# Altium PCB edl_final.PcbDoc
Units mil, origin at the board's own origin, x right, y up, seen from the top; angles counter-clockwise.
Board outline 2700 x 2100 mil, 2 copper layers (Top Layer, Bottom Layer); 67 components, 53 nets, 310 pads, 438 vias.
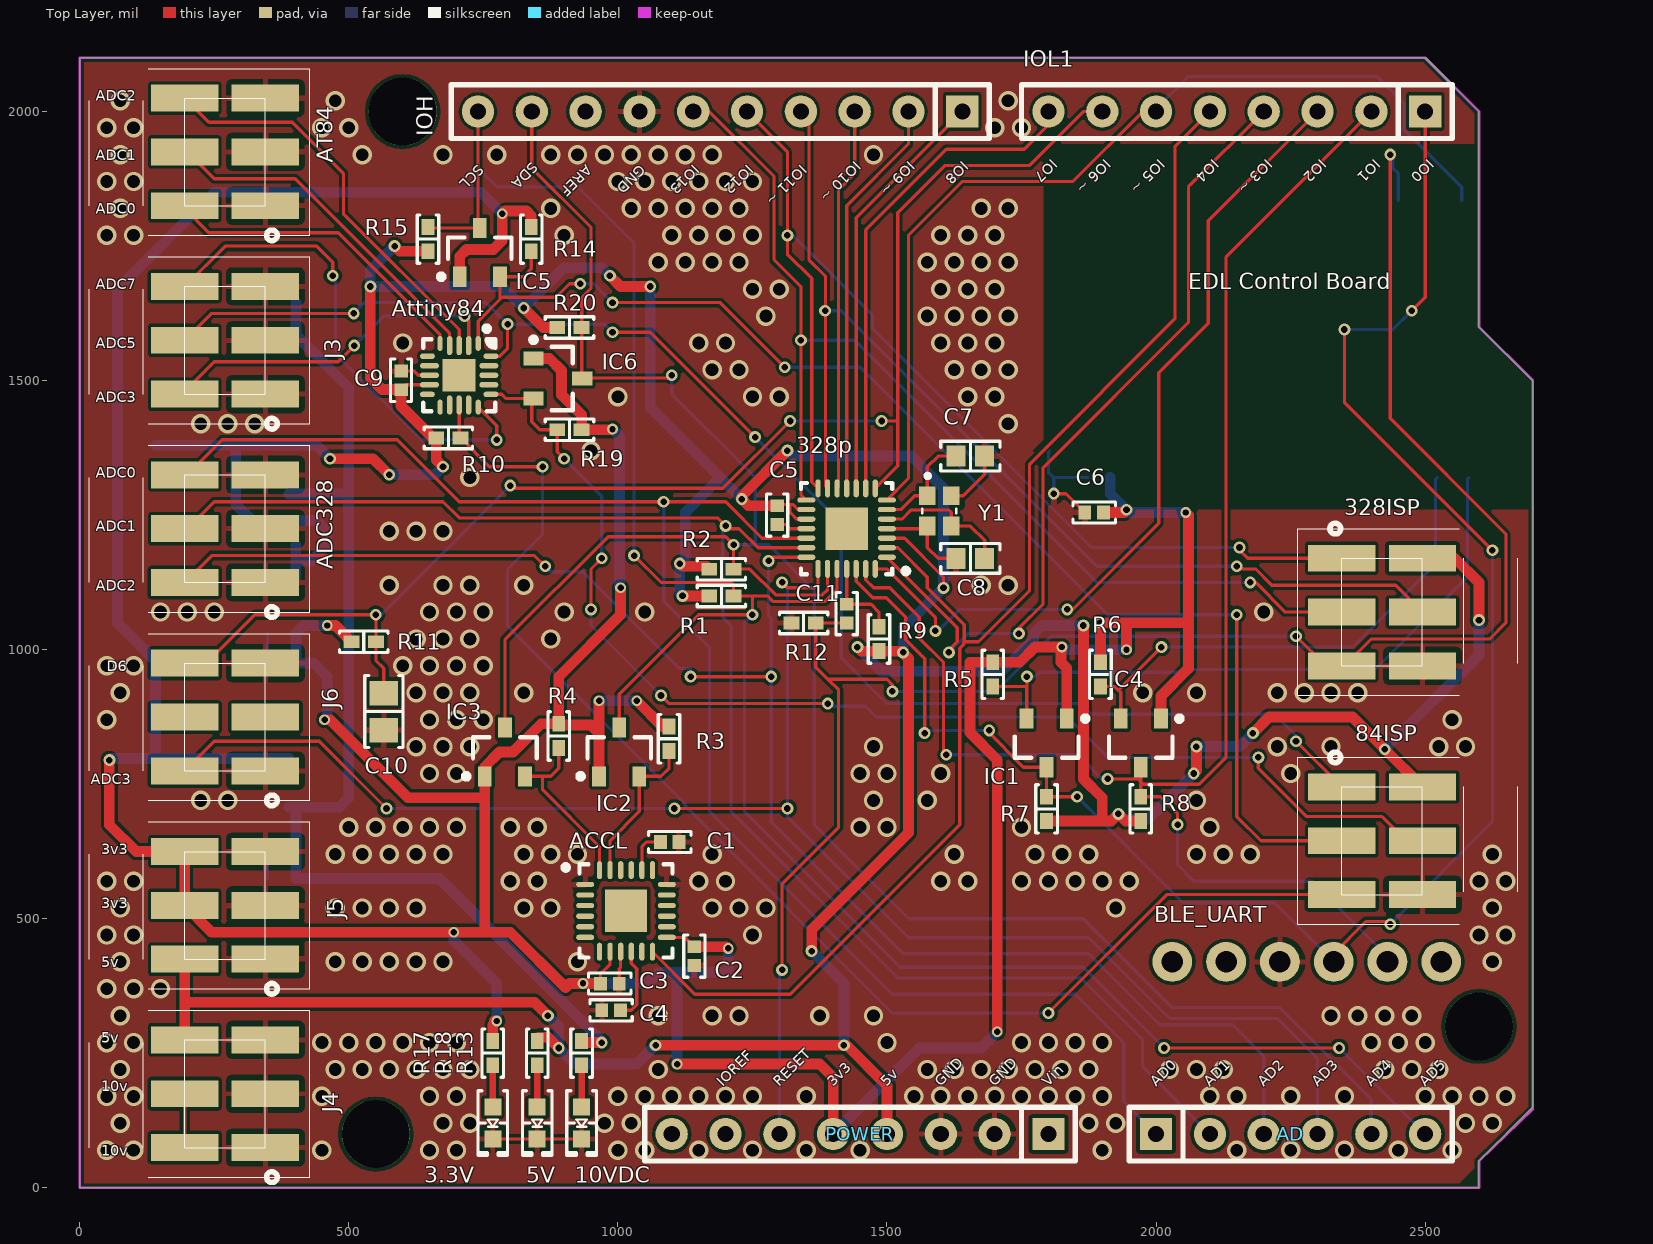
[diagram p0: Top Layer view]
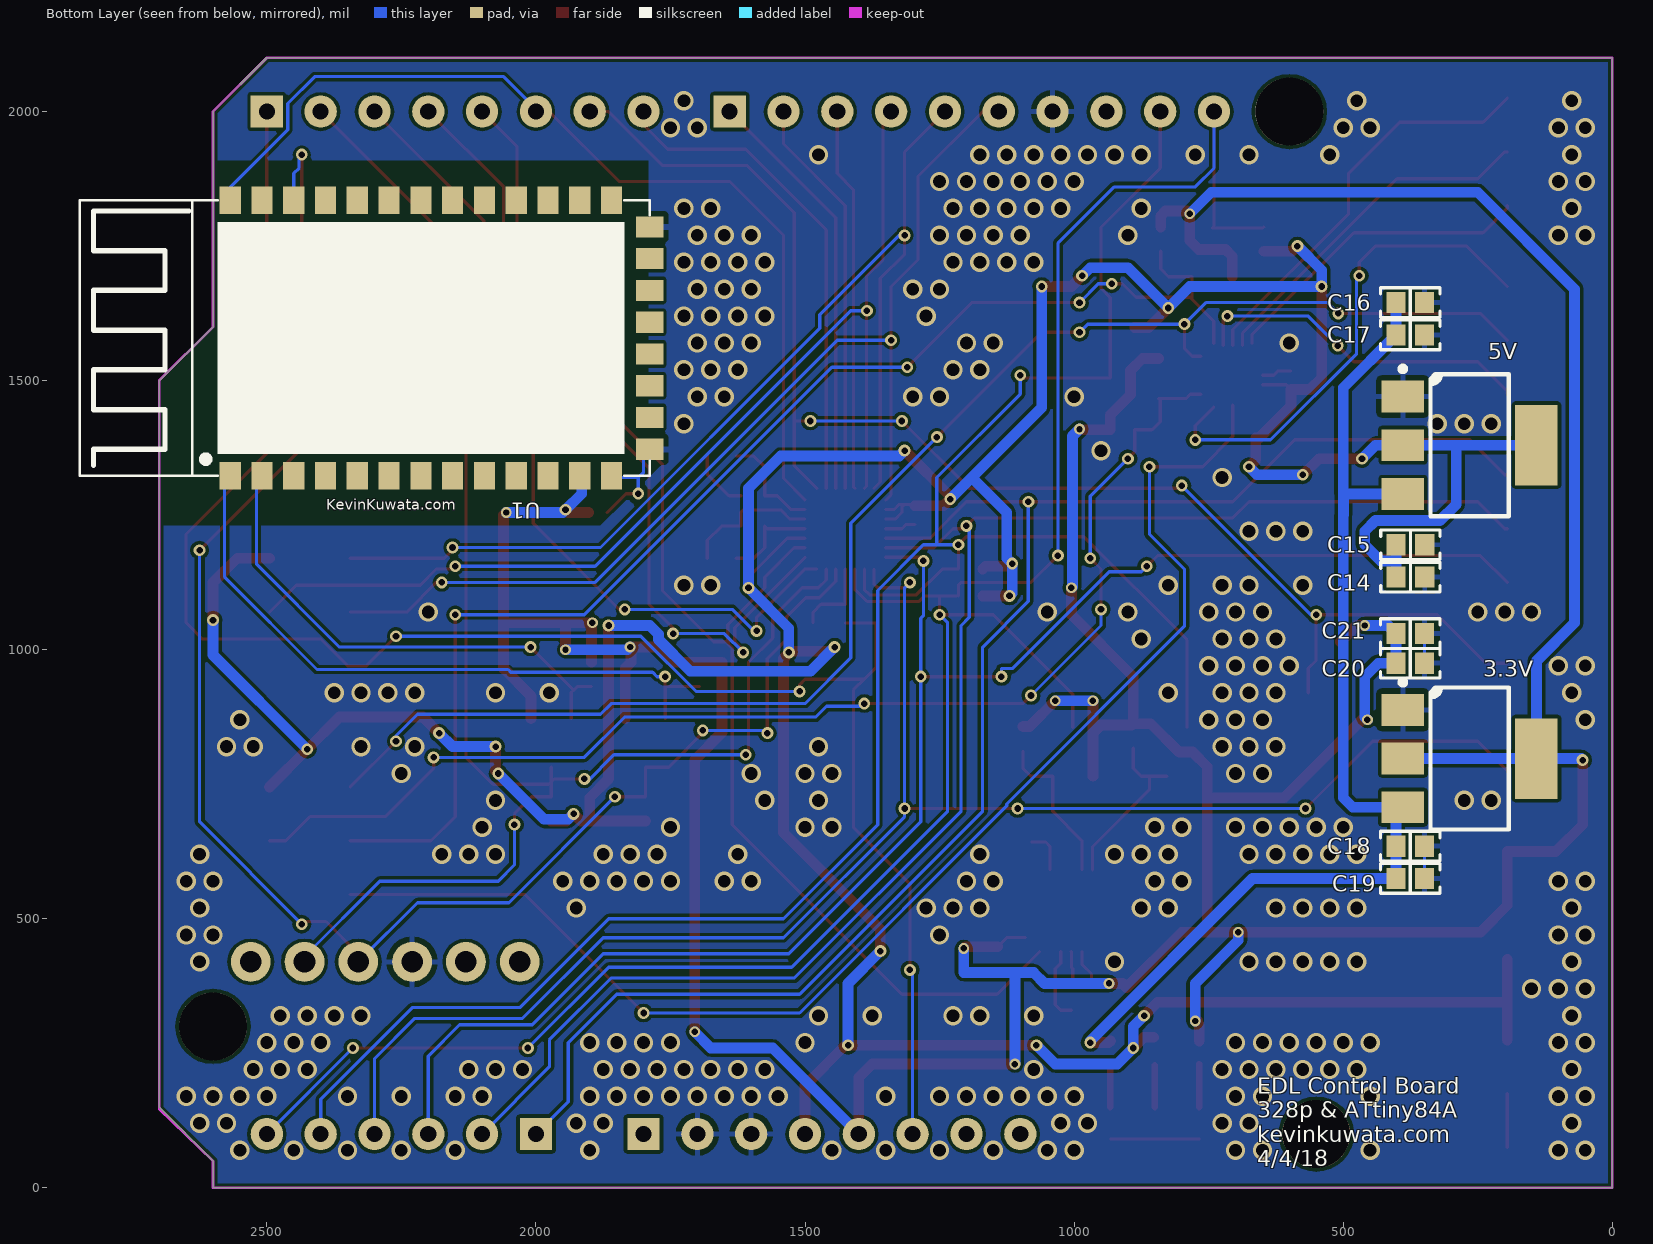
[diagram p1: Bottom Layer view, seen from below]

## Layer stack, top to bottom
Top Solder: solder mask 0.4, Solder Resist, Dk 3.5
Top Layer: signal copper 1.4
Dielectric1: dielectric 12.6, FR-4, Dk 4.8
Bottom Layer: signal copper 1.4
Bottom Solder: solder mask 0.4, Solder Resist, Dk 3.5

## Board outline
0,0 0,2100 2500,2100 2600,2000 2600,1600 2700,1500 2700,150 2600,50 2600,0

## Design rules (kind name [scope] priority, off if disabled: settings)
Clearance [All] p1: gap=6 ignorepadtopadclearanceinfootprint=FALSE
HoleSize [All] p1: absolutevalues=TRUE maxlimit=100 minlimit=11.81 maxpercent=80.000 minpercent=20.000
PolygonConnect [All] p1: connectstyle=Relief reliefconductorwidth=10 reliefentries=4 polygonreliefangle="90 Angle" airgapwidth=10
RoutingTopology [OnLayer('Top Layer')] p1: topology=Vertical
RoutingTopology RoutingTopology_1 [OnLayer('Bottom Layer')] p2: topology=Vertical
RoutingVias [All] p1: holewidth=11.81 width=20 viastyle="Through Hole" minholewidth=11.81 minwidth=20 maxholewidth=12.2 maxwidth=22
SilkToSolderMaskClearance SilkscreenOverComponentPads [IsPad] p1: minsilkscreentomaskgap=10 clearancetoexposedcopper=TRUE
SolderMaskExpansion [All] p1: expansion=4
Width [InNet('3V3')] p1: maxlimit=100 minlimit=6 preferedwidth=20
Width Width_2 [InNet('5V')] p2: maxlimit=50 minlimit=6 preferedwidth=20
Width Width_1 [All] p3: maxlimit=50 minlimit=6 preferedwidth=6
27 further rules are at their usual default settings.

## Components (designator, comment, footprint, x,y, rotation, side; value= is the part's Value field where it differs from the comment)
3.3V "Colour" "LED 0603/1608 RED" 767.5,120.47 r270 top value=Green
3.3V "NCP1117ST15T3G" "ON SEMI SOT-223 ST(318H)" 265,797.72 r180 bottom
5V "Colour" "LED 0603/1608 RED" 850,120.47 r270 top value=Green
5V "5v" "ON SEMI SOT-223 ST(318H)" 265,1380 r180 bottom
10VDC "Colour" "LED 0603/1608 RED" 932.5,120.47 r270 top value=Green
84ISP "smd2x6_90*" smd36 2433.01,770 r270 top
328ISP "smd2x6_90*" smd36 2433.01,1195 r270 top
328p "atmeag328p" yy] 1425,1225 r180 top
ACCL "MPU6050" MPU-6050 1015,514.72 r0 top
AD "AD" "Header 6x1 8.5mm" 2000,100 r0 top locked
ADC328 "smd2x6_90*" smd36 256.99,1100 r90 top (schematic designator ADC012)
AT84 "smd2x6_90*" smd36 256.99,1800 r90 top (schematic designator J2)
Attiny84 "ATTINY84A-MMH" "Atmel VQFN-20 3x3mm 20M2" 705,1510 r270 top
BLE_UART "HC-05 Header" 1X06_NO_SILK 2530,420 r180 top
C1 "2.2nF" "CAP 0402/1005" 1096.32,642.72 r0 top value=0.1uF
C2 "0.1uF" "CAP 0402/1005" 1142,430.72 r90 top
C3 "0.01uF" "CAP 0402/1005" 985,379.72 r180 top value=0.1uF
C4 "0.1uF" "CAP 0402/1005" 987.32,330 r0 top
C5 "0.1uF" "CAP 0402/1005" 1296,1250.13 r270 top
C6 "0.1uF" "CAP 0402/1005" 1885,1255 r0 top
C7 "22pF" "CAP 0603/1608" 1655,1359.8 r180 top
C8 "22pF" "CAP 0603/1608" 1655,1169.8 r0 top
C9 "0.1uF" "CAP 0402/1005" 597,1500.68 r270 top
C10 "10uF" "RES 0805/2012" 565,885 r270 top value=0.1uF
C11 "0.1uF" "CAP 0402/1005" 1425,1067.13 r270 top
C14 "47uF" "CAP 0603/1608" 375,1135 r0 bottom value=0.1uF
C15 "47uF" "CAP 0603/1608" 375,1195 r0 bottom value=0.1uF
C16 "47uF" "CAP 0603/1608" 375.24,1645 r0 bottom value=0.1uF
C17 "47uF" "CAP 0603/1608" 375.24,1585 r0 bottom value=0.1uF
C18 "47uF" "CAP 0603/1608" 375.24,635 r0 bottom value=0.1uF
C19 "47uF" "CAP 0603/1608" 375.24,575 r0 bottom value=0.1uF
C20 "47uF" "CAP 0603/1608" 375.24,975 r0 bottom value=0.1uF
C21 "47uF" "CAP 0603/1608" 375.24,1030 r0 bottom value=0.1uF
IC1 "2N7002-7-F" "DIODES SOT-23-3" 1796.57,826.81 r270 top
IC2 "2N7002-7-F" "DIODES SOT-23-3" 1002.4,810 r90 top
IC3 "2N7002-7-F" "DIODES SOT-23-3" 790,810 r90 top
IC4 "2N7002-7-F" "DIODES SOT-23-3" 1971.57,826.81 r270 top
IC5 "2N7002-7-F" "DIODES SOT-23-3" 743.4,1738.39 r90 top
IC6 "2N7002-7-F" "DIODES SOT-23-3" 888.39,1504 r0 top
IOH "IOH" "Header 10x1 8.5mm" 1640,2000 r180 top locked
IOL1 "IOL" "Header 8x1 8.5mm" 2500,2000 r180 top locked
J3 "smd2x6_90*" smd36 256.99,1450 r90 top
J4 "smd2x6_90*" smd36 256.99,50 r90 top
J5 "smd2x6_90*" smd36 256.99,400 r90 top
J6 "smd2x6_90*" smd36 256.99,750 r90 top
POWER "POWER_UNO" "Header 8x1 8.5mm" 1800,100 r180 top locked
R1 "10k" "RES 0402/1005" 1192.36,1099.8 r180 top
R2 "10k" "RES 0402/1005" 1192.36,1149.8 r180 top
R3 "10k" "RES 0402/1005" 1095,834.61 r90 top
R4 "10k" "RES 0402/1005" 890,839.72 r90 top
R5 "10k" "RES 0402/1005" 1696.57,954.17 r90 top
R6 "10k" "RES 0402/1005" 1896.57,954.17 r90 top
R7 "10k" "RES 0402/1005" 1796.57,704.17 r270 top
R8 "10k" "RES 0402/1005" 1971.57,704.17 r270 top
R9 "10k" "RES 0402/1005" 1485,1020 r270 top
R10 "10k" "RES 0402/1005" 685,1393.62 r180 top
R11 "10k" "RES 0402/1005" 527.64,1015 r180 top
R12 "1K" "RES 0402/1005" 1345,1049.8 r0 top
R13 "10k" "RES 0402/1005" 932.5,250.47 r90 top
R14 "10k" "RES 0402/1005" 839,1763 r90 top
R15 "10k" "RES 0402/1005" 647,1763 r270 top
R17 "" "RES 0402/1005" 767.5,250.47 r90 top value=1k
R18 "1k" "RES 0402/1005" 850,250.47 r90 top
R19 "10k" "RES 0402/1005" 910,1408.62 r0 top
R20 "10k" "RES 0402/1005" 910,1598.62 r180 top
U1 "MOUDLE-BLUETOOTH-HC-05(34P-27X13MM)" BT34P-SMD-1.5-26.9X13.0X2.2MM 1788.58,1579.09 r90 bottom
Y1 "FA238" OSCCC200X160X50 1597.24,1257.95 r270 top (schematic designator 1)

## Footprints (in the part's own frame and the unit in brackets; to place one, negate y for a bottom-side part, rotate by r counter-clockwise, add the part's x,y. Pads: shape width x height; smd on the part's side, far side on the other; paste and mask are expansions set on the pad)
1X06_NO_SILK [mil]
  round 74 hole 40: 1(0,0) 2(100,0) 3(200,0) 4(300,0) 5(400,0) 6(500,0)
"Atmel VQFN-20 3x3mm 20M2" [mm] "VQFN, 20-Leads, Body 3.00x3.00mm, Pitch 0.45mm, Thermal Pad 1.55x1.55mm, IPC Medium Density"
  oval 0.7x0.25 smd: 1(-1.5,0.9) 5(-1.5,-0.9) 11(1.5,-0.9) 15(1.5,0.9)
  oval 0.9x0.25 smd: 2(-1.4,0.45) 3(-1.4,0) 4(-1.4,-0.45) 12(1.4,-0.45) 13(1.4,0) 14(1.4,0.45)
  oval 0.25x0.7 smd: 6(-0.9,-1.5) 10(0.9,-1.5) 16(0.9,1.5) 20(-0.9,1.5)
  oval 0.25x0.9 smd: 7(-0.45,-1.4) 8(0,-1.4) 9(0.45,-1.4) 17(0.45,1.4) 18(0,1.4) 19(-0.45,1.4)
  rect 1.55x1.55 smd: 21(0,0)
  silkscreen extent -2.32,-1.7 1.7,1.7, body extent -1.55,-1.55 1.55,1.55, height 0.85
BT34P-SMD-1.5-26.9X13.0X2.2MM [mm]
  rect 1.3x1 smd: 1(-6.5,19.8) 2(-6.5,18.3) 3(-6.5,16.8) 4(-6.5,15.3) 5(-6.5,13.8) 6(-6.5,12.3) 7(-6.5,10.8) 8(-6.5,9.3) 9(-6.5,7.8) 10(-6.5,6.3) 11(-6.5,4.8) 12(-6.5,3.3) 13(-6.5,1.8) 22(6.5,1.8) 23(6.5,3.3) 24(6.5,4.8) 25(6.5,6.3) 26(6.5,7.8) 27(6.5,9.3) 28(6.5,10.8) 29(6.5,12.3) 30(6.5,13.8) 31(6.5,15.3) 32(6.5,16.8) 33(6.5,18.3) 34(6.5,19.8)
  rect 1x1.3 smd: 14(-5.25,0) 15(-3.75,0) 16(-2.25,0) 17(-0.75,0) 18(0.75,0) 19(2.25,0) 20(3.75,0) 21(5.25,0)
  silkscreen extent -6.5,0 6.5,26.9, body extent -6.6,-0.23 6.4,26.67, height 3.8
"CAP 0402/1005" [mm] "Chip Capacitor, 2-Leads, Body 1.02x0.51mm, IPC Medium Density"
  rect 0.6x0.64 smd: 1(-0.44,0) 2(0.44,0)
  silkscreen extent -1,-0.5 1,0.5, body extent -0.5,-0.26 0.5,0.26, height 0.52
"CAP 0603/1608" [mm] "Chip Capacitor, 2-Leads, Body 1.60x0.80mm, IPC Medium Density"
  rect 0.9x1 smd: 1(-0.675,0) 2(0.675,0)
  silkscreen extent -1.4,-0.7 1.4,0.7, body extent -0.8,-0.41 0.8,0.41, height 0.82
"DIODES SOT-23-3" [mm] "SOT23, 3-Leads, Body 2.90x2.40mm, Pitch 0.95mm, IPC Medium Density"
  rect 0.95x0.65 smd: 1(-1.15,0.95) 2(1.15,0) 3(-1.15,-0.95)
  silkscreen extent -1.27,-1.5 0.7,1.95, body extent -1.41,-1.45 1.41,1.45, height 1.5
"Header 6x1 8.5mm" [mil] "Stackable 6 pin header"
  rect 60x60 hole 30: 1(0,0)
  round 60 hole 30: 2(100,0) 3(200,0) 4(300,0) 5(400,0) 6(500,0)
  silkscreen extent -50,-50 550,50, body extent -50,-50 550,50, height 335
"Header 8x1 8.5mm" [mil] "Stackable 8 pin header"
  rect 60x60 hole 30: 1(0,0)
  round 60 hole 30: 2(100,0) 3(200,0) 4(300,0) 5(400,0) 6(500,0) 7(600,0) 8(700,0)
  silkscreen extent -50,-50 750,50, body extent -50,-50 750,50, height 335
"Header 10x1 8.5mm" [mil] "Stackable 10 pin header"
  rect 60x60 hole 30: 1(0,0)
  round 60 hole 30: 2(100,0) 3(200,0) 4(300,0) 5(400,0) 6(500,0) 7(600,0) 8(700,0) 9(800,0) 10(900,0)
  silkscreen extent -50,-50 950,50, body extent -50,-50 950,50, height 335
"LED 0603/1608 RED" [mm] "Chip Diode, 2-Leads, Body 1.60x0.80mm, IPC Medium Density"
  rect 0.8x0.8 smd: 1(-0.75,0) 2(0.75,0)
  silkscreen extent -1.52,-0.7 1.52,0.7, body extent -0.8,-0.4 0.8,0.4, height 0.53
MPU-6050 [mm] "QFN, 24-Leads, Body 4.00x4.00mm, Pitch 0.50mm, Thermal Pad 2.00x2.00mm, IPC Medium Density"
  oval 0.85x0.25 smd: 1(-1.925,1.25) 2(-1.925,0.75) 3(-1.925,0.25) 4(-1.925,-0.25) 5(-1.925,-0.75) 6(-1.925,-1.25) 13(1.925,-1.25) 14(1.925,-0.75) 15(1.925,-0.25) 16(1.925,0.25) 17(1.925,0.75) 18(1.925,1.25)
  oval 0.25x0.85 smd: 7(-1.25,-1.925) 8(-0.75,-1.925) 9(-0.25,-1.925) 10(0.25,-1.925) 11(0.75,-1.925) 12(1.25,-1.925) 19(1.25,1.925) 20(0.75,1.925) 21(0.25,1.925) 22(-0.25,1.925) 23(-0.75,1.925) 24(-1.25,1.925)
  rect 2x2 smd: 25(0,0)
  silkscreen extent -2.97,-2.2 2.2,2.2, body extent -2.1,-2.1 2.1,2.1, height 0.95
"ON SEMI SOT-223 ST(318H)" [mm] "SOT223, 4-Leads, Body 6.50x7.00mm (avg), Pitch 2.30mm, IPC Medium Density"
  rect 2x1.5 smd: 1(-3.15,2.3) 2(-3.15,0) 3(-3.15,-2.3)
  rect 2x3.8 smd: 4(3.15,0)
  silkscreen extent -3.27,-3.35 1.85,3.72, body extent -3.52,-3.25 3.5,3.25, height 1.8
OSCCC200X160X50 [mm]
  rect 0.89x0.79 smd: 1(-0.715,-0.565) 2(0.715,-0.565) 3(0.715,0.565) 4(-0.715,0.565)
  silkscreen extent -1.75,-0.8 0.1,0.8
"RES 0402/1005" [mm] "Chip Resistor, 2-Leads, Body 1.0x0.5mm, IPC Medium Density"
  rect 0.75x0.6 smd: 1(-0.575,0) 2(0.575,0)
  silkscreen extent -1.14,-0.51 1.14,0.51, body extent -0.5,-0.25 0.5,0.25, height 0.35
"RES 0805/2012" [mm] "Chip Resistor, 2-Leads, Body 2.00x1.25mm, IPC Medium Density"
  rect 1.15x1.35 smd: 1(-0.875,0) 2(0.875,0)
  silkscreen extent -1.7,-0.9 1.7,0.9, body extent -0.95,-0.62 1.05,0.63, height 0.6
smd36 [mm] "double header DH http://suddendocs.samtec.com/prints/tsm-dh-footprint.pdf"
  rect 1.27x3.18 smd: 1(0.635,-2.235) 2(3.175,-2.235) 3(5.715,-2.235) 4(5.715,1.575) 5(3.175,1.575) 6(0.635,1.575)
  silkscreen extent -1.02,-4.32 7.11,6.07
yy] [mm] "QFN, 28-Leads, Body 3.98x3.98mm, Pitch 0.45mm, Thermal Pad 2.00x2.00mm, IPC Medium Density"
  oval 0.85x0.25 smd: 1(-1.9,1.35) 2(-1.9,0.9) 3(-1.9,0.45) 4(-1.9,0) 5(-1.9,-0.45) 6(-1.9,-0.9) 7(-1.9,-1.35) 15(1.9,-1.35) 16(1.9,-0.9) 17(1.9,-0.45) 18(1.9,0) 19(1.9,0.45) 20(1.9,0.9) 21(1.9,1.35)
  oval 0.25x0.85 smd: 8(-1.35,-1.9) 9(-0.9,-1.9) 10(-0.45,-1.9) 11(0,-1.9) 12(0.45,-1.9) 13(0.9,-1.9) 14(1.35,-1.9) 22(1.35,1.9) 23(0.9,1.9) 24(0.45,1.9) 25(0,1.9) 26(-0.45,1.9) 27(-0.9,1.9) 28(-1.35,1.9)
  rect 2x2 smd: 29(0,0)
  silkscreen extent -2.93,-2.15 2.15,2.15, body extent -2.05,-2.05 2.05,2.05, height 0.95

## Part data
3.3V 5V 10VDC: library part LTST-C191KRKT, "LED RED CLEAR 0603 SMD", Part Number=LTST-C191KRKT
3.3V: "IC REG LDO 1.5V 1A SOT223", Part Number=NCP1117ST15T3G
5V: library part NCP1117ST15T3G, "IC REG LDO 1.5V 1A SOT223", Part Number=NCP1117ST15T3G
84ISP 328ISP ADC328 AT84 J3 J4 J5 J6: library part SAM10788-ND, "90 degree 0.1\" header digkey SAM10788-ND", Digikey=SAM10788-ND
328p: library part 328p_28QFN, "28 pin qfn, or mlf 28 pin compatible with uno", Package="28QFN 4x4", Digikey=ATMEGA328P-MURCT-ND
ACCL: library part MPU-6050, "IMU ACCEL/GYRO 3-AXIS I2C 24QFN", Name=MPU6050
AD: Supplier Part Number 1=2699089, Supplier 1=Arrow, Supplier 2=Digi-Key, Supplier 3=Arrow, Supplier 4=Arrow, Supplier Part Number 2=SAM1198-06-ND, Supplier Part Number 3=2699088, Supplier Part Number 4=2699075
Attiny84: "IC MCU 8BIT 8KB FLASH 20VQFN", Device Package="20-VFQFN Exposed Pad", Manufacturer=Atmel, Supplier Part Number 1=ATTINY84A-MMH-ND, ComponentLink1Description=Datasheet, ComponentLink1URL=http://www.atmel.com/Images/8183s.pdf, ComponentLink2Description="Digi-Key Listing", ComponentLink2URL=https://www.digikey.com/product-detail/en/ATTINY84A-MMH/ATTINY84A-MMH-ND/3046449, Core Processor=AVR, Core Size=8-Bit, Data Converters="A/D 8x10b", EEPROM Size="512 x 8", Number Of IO=12, Oscillator Type=Internal, PartId=9189, Part Number=ATTINY84A-MMH, Price=1.87, Program Memory Size="8KB (4K x 16)", Program Memory Type=FLASH, Ram Size="512 x 8", Series="AVR® ATtiny", Speed=20MHz, Supplier 1=Digi-Key
BLE_UART: library part CONN_06NO_SILK_NO_POP
C1: library part C1005X7R1C104K050BC, "CAP CER 0.1UF 16V X7R 0402", Device Package="0402 (1005 Metric)", Manufacturer="TDK Corporation", Supplier Part Number 1=445-4952-2-ND, TemperatureCoefficient=X7R, TemperatureRange="-55C ~ 125C", Tolerance=10%, Voltage=50V, ComponentLink1Description=Datasheet, ComponentLink1URL=https://product.tdk.com/info/en/catalog/datasheets/mlcc_commercial_general_en.pdf, ComponentLink2Description="Digi-Key listing", ComponentLink2URL=http://digikey.com/product-detail/en/C1005X7R1C104K050BC/445-4952-2-ND/2093220, PartId=3856, Part Number=C1005X7R1C104K050BC, Price=0.0066, Supplier 1=Digi-Key, Type=-
C2 C3: library part C1005X7R1C104K050BC, "CAP CER 0.1UF 16V X7R 0402", Device Package="0402 (1005 Metric)", Manufacturer="TDK Corporation", Supplier Part Number 1=445-4952-2-ND, TemperatureCoefficient=X7R, TemperatureRange="-55C ~ 125C", Tolerance=10%, Voltage=4V, ComponentLink1Description=Datasheet, ComponentLink1URL=https://product.tdk.com/info/en/catalog/datasheets/mlcc_commercial_general_en.pdf, ComponentLink2Description="Digi-Key listing", ComponentLink2URL=http://digikey.com/product-detail/en/C1005X7R1C104K050BC/445-4952-2-ND/2093220, PartId=3856, Part Number=C1005X7R1C104K050BC, Price=0.0066, Supplier 1=Digi-Key, Type=-
C4: library part C1005X7R1C104K050BC, "CAP CER 0.1UF 16V X7R 0402", Device Package="0402 (1005 Metric)", Manufacturer="TDK Corporation", Supplier Part Number 1=445-4952-2-ND, TemperatureCoefficient=X7R, TemperatureRange="-55C ~ 125C", Tolerance=10%, Voltage=2V, ComponentLink1Description=Datasheet, ComponentLink1URL=https://product.tdk.com/info/en/catalog/datasheets/mlcc_commercial_general_en.pdf, ComponentLink2Description="Digi-Key listing", ComponentLink2URL=http://digikey.com/product-detail/en/C1005X7R1C104K050BC/445-4952-2-ND/2093220, PartId=3856, Part Number=C1005X7R1C104K050BC, Price=0.0066, Supplier 1=Digi-Key, Type=-
C5 C6 C9 C11: library part C1005X7R1C104K050BC, "CAP CER 0.1UF 16V X7R 0402", Device Package=0402, Manufacturer="TDK Corporation", Supplier Part Number 1=445-4952-2-ND, TemperatureCoefficient=X7R, TemperatureRange="-55C ~ 125C", Tolerance=10%, Voltage=10v, ComponentLink1Description=Datasheet, ComponentLink1URL=https://product.tdk.com/info/en/catalog/datasheets/mlcc_commercial_general_en.pdf, ComponentLink2Description="Digi-Key listing", ComponentLink2URL=http://digikey.com/product-detail/en/C1005X7R1C104K050BC/445-4952-2-ND/2093220, PartId=3856, Part Number=C1005X7R1C104K050BC, Price=0.0066, Supplier 1=Digi-Key, Type=-
C7 C8: library part C1608C0G1H220J080AA, "CAP CER 22PF 50V C0G 0603", Device Package=0603, Manufacturer="TDK Corporation", Supplier Part Number 1=445-1273-1-ND, TemperatureCoefficient="C0G, NP0", TemperatureRange="-55C ~ 125C", Tolerance=5%, Voltage=50V, ComponentLink1Description=Datasheet, ComponentLink1URL=https://product.tdk.com/info/en/catalog/datasheets/mlcc_commercial_general_en.pdf, ComponentLink2Description="Digi-Key listing", ComponentLink2URL=http://digikey.com/product-detail/en/C1608C0G1H220J080AA/445-1273-1-ND/567670, PartId=4031, Part Number=C1608C0G1H220J080AA, Price=0.14, Supplier 1=Digi-Key, Type=-
C10: library part C2012X7R1H104K085AA, "CAP CER 0.1UF 50V X7R 0805", Package=0805, Part Number=C2012X7R1H104K085AA
C14 C15 C16 C17 C18 C19 C20 C21: library part C1608X7R1E104K080AA, "CAP CER 0.1UF 25V X7R 0603", Part Number=C1608X7R1E104K080AA
IC1 IC2 IC3 IC4 IC5 IC6: "MOSFET N-CH 60V 115MA SOT23-3", Current Continuous Drain="115mA (Ta)", Device Package="TO-236-3, SC-59, SOT-23-3", Drain to Source Voltage (Vdss)=60V, Input Capacitance (Ciss) at Vds="50pF @ 25V", Manufacturer="Diodes Incorporated", Power - Max=370mW, Supplier Part Number 1=2N7002-FDITR-ND, ComponentLink1Description=Datasheet, ComponentLink1URL=http://www.diodes.com/_files/datasheets/ds11303.pdf, ComponentLink2Description="Digi-Key Listing", ComponentLink2URL=http://www.digikey.com/product-detail/en/2N7002-7-F/2N7002-FDITR-ND/717681, Digikey=1727-1289-1-ND, Features=Standard, Gate Charge (Qg)=-, PartId=7967, Part Number=2N7002-7-F, Price=0.0255, Rds On (Max) at Id, Vgs="7.5 Ohm @ 50mA, 5V", Supplier 1=Digi-Key, Type="MOSFET N-Channel, Metal Oxide", Vgs(th) (Max) at Id="2.5V @ 250uA"
IOH: Supplier Part Number 1=2698803S4475693N1004, Supplier 1=Arrow, Supplier 2=Digi-Key, Supplier 3=Arrow, Supplier Part Number 2=SAM1198-10-ND, Supplier Part Number 3=2698789
IOL1 POWER: Supplier Part Number 1=SAM1198-08-ND, Supplier 1=Digi-Key, Supplier 2=Arrow, Supplier 3=Arrow, Supplier 4=Arrow, Supplier Part Number 2=2698939, Supplier Part Number 3=2698940, Supplier Part Number 4=2698925
R1 R2 R3 R4 R5 R6 R7 R8 R9 R10 R11 R12 R13 R14 R15 R17 R18 R19 R20: library part ERJ-2RKF1002X, "RES SMD 10K OHM 1% 1/10W 0402", Device Package=0402, Manufacturer="Panasonic Electronic Components", PowerRating="0.1W, 1/10W", Supplier Part Number 1=P10.0KLTR-ND, TemperatureCoefficient=100ppm/C, TemperatureRange="-55C ~ 155C", Tolerance=1%, ComponentLink1Description=Datasheet, ComponentLink1URL=http://industrial.panasonic.com/www-cgi/jvcr13pz.cgi?E+PZ+3+AOA0002+ERJ2RKF1002X+7+WW, ComponentLink2Description="Digikey listing", ComponentLink2URL=http://digikey.com/product-detail/en/ERJ-2RKF1002X/P10.0KLTR-ND/192073, PartId=1, Part Number=ERJ-2RKF1002X, Price=0.0043, Supplier 1=Digi-Key, Type="Thick Film"
U1: Package=SOIC-14, Availability=Unavailable, MP=HC-05, Price=None
Y1: "FA238 4 pin can crstyal"

## Free pads (board coordinates)
  round 125.98 hole 125.98: 0(550,100) 0(600,2000) 0(2600,300)

## Via types
v1: diameter 36, hole 23.62, Top Layer to Bottom Layer, 322 vias
v2: diameter 22, hole 12.2, Top Layer to Bottom Layer, tented both sides, 98 vias
v3: diameter 20, hole 11.81, Top Layer to Bottom Layer, tented both sides, 17 vias
v4: diameter 36, hole 23.62, Top Layer to Bottom Layer, tented both sides, 1 vias

## Nets (pads, with @x,y where several pads share a name; then routed paths per layer and width w, separated by ;. In a path a pad name is that pad's centre, name@x,y a point inside that pad or via, vN(x,y) a via of type N, cw(c..) or ccw(c..) an arc to the next point about the centre after c; other vN are vias at no path point)
3V3: 3.3V.2@389.02,797.72 3.3V.4 ACCL.8 ACCL.13 C2.2 C3.2 C6.2 C20.2 C21.2 IC1.1 IC2.1 IC3.1 IC4.1 IC5.1 IC6.1 J5.4 J5.5 POWER.5 R3.2 R4.2 R5.2 R6.2 R11.2 R14.2 R17.2 R19.2 U1.12 | length 9696.7
  Top Layer w6: C3.2 967.68,397.68 985.47,415.47 ACCL.8 ; ACCL.13 1124.54,465.51 C2.2
  Top Layer w20: v2(55,795) 55,675 105,625 J5.4 J5.5 245,475 v3(695,475) 745,475 ; v3(455,870) 465,870 610,725 747.6,725 752.6,720 ; v3(460,1045) 475,1045 R11.2 ; IC5.1 706,1731 718.62,1743.62 768.25,1743.62 785,1760.37 v3(785,1810) 790,1815 830,1815 839,1806 R14.2 ; R17.2 767.5,302.5 v3(775,310) v3@770,310 ; IC6.1 872.22,1541.4 895,1518.62 895,1473.62 932.64,1435.98 R19.2 988.62,1408.62 v3(990,1410) ; IC2.1 965,845 ; v3(965,905) 965,845 ; C3.2 935.28,379.72 v3(935,380) 910,380 902.5,372.5 800,475 745,475 ; v3(1005,1115) 1005,1065 890,950 R4.2 ; v3(1035,905) 1082.76,857.24 R3.2 ; v3(1110,230) 1375,230 1400,205 POWER.5 ; C2.2 1201.95,448.05 v3(1205,445) ; v3(1705,290) 1705,795 1654,846 1654,976.81 R5.2 1746.81,976.81 1775,1005 v3(1825,1005) 1823.19,1003.19 1823.19,976.81 1833.97,966.03 IC1.1 ; v3(1895,1050) 1896.57,1048.43 R6.2 ; v3@1896.57,1050 1945,1050 ; C6.2 1940,1255 v2(1945,1260) ; v3(1945,1000) 1945,1050 ; IC4.1 2008.97,913.97 2060,965 2060,1250 v3(2055,1255) ; 2060,1050 1945,1050 ; 745,475 752.6,482.6 752.6,720 ; 752.6,720 IC3.1 752.6,782.6 780,810 805,810 857.36,862.36 R4.2 ; R4.2 892.36,860 950,860 965,845
  Bottom Layer w20: v2(55,795) 57.72,797.72 3.3V.4 ; 3.3V.2@389.02,797.72 3.3V.4 ; v3(455,870) 460,875 460,950 435,975 C20.2 C21.2 416.81,1045 v3(460,1045) ; v3(695,475) 695,460 775,380 v3(775,310) ; v3(785,1810) 745,1850 250,1850 70,1670 70,1050 140.98,979.02 3.3V.4 ; v3(935,380) 1055,380 1075,400 1110,400 ; v3(965,905) v3(1035,905) ; v3(990,1410) 1003,1397 1003,1117 v3(1005,1115) ; v3(1110,230) 1110,400 ; v3(1205,445) 1205,400 1110,400 ; POWER.5 1560,260 1675,260 v3(1705,290) ; v3(1825,1005) 1830,1000 v3(1945,1000) ; U1.12@1915,1320 1915,1290 v2(1945,1260) 1950,1255 v3(2055,1255)
5V: 5V.2@389.02,1380 5V.4 84ISP.6 328ISP.6 328p.3 328p.16 328p.17 Attiny84.9 C5.1 C9.2 C14.2 C15.2 J4.4 J5.6 POWER.4 R1.2 R2.2 R7.2 R8.2 R9.2 R10.2 R15.2 R18.2 R20.2 | length 9163.6
  Top Layer w6: C9.2 605.93,1492.28 Attiny84.9 ; C5.1 1298.55,1270 1315,1270 ; 328p.17 1332.28,1242.72 1320,1255 1320,1265 1315,1270 ; 328p.16 1334.57,1260.43 1325,1270 1315,1270 ; 328p.3 1532.72,1207.28 1605,1135 v2(1605,1115)
  Top Layer w20: J4.4 195,345 ; J5.6 195,345 ; v2(465,1355) 545,1355 v2(575,1325) ; v2(540,1675) 540,1505 561.65,1483.35 C9.2 597,1453 656.38,1393.62 R10.2 662.36,1352.64 v2(675,1340) ; v2(585,1750) 594.64,1740.36 R15.2 ; v2(825,1635) 861.38,1598.62 R20.2 ; R18.2@852.5,280 870,280 v2(890,260) ; v2(870,320) 845,345 195,345 ; v2(985,1695) 1005,1675 v2(1060,1675) ; v2(1070,265) v2(1420,265) 1425,265 1500,190 POWER.4 ; v2(1115,1160) 1120,1155 1164.53,1155 R2.2 ; v2(1120,1100) 1120.2,1099.8 R1.2 ; C5.1 1242.55,1267.45 v2(1230,1280) 1230,1285 v2(1315,1370) ; v2(1360,440) 1360,480 1540,660 1540,983.59 v2@1529.29,994.29 ; v2(1445,1005) 1452.64,997.36 R9.2 1527.64,997.36 v2(1530,995) ; R7.2 1900,681.54 ; v2(1865,1045) 1865,760 1900,725 1900,681.54 ; R8.2 1943.46,681.54 v2(1930,695) 1916.54,681.54 1900,681.54 ; v2(2070,770) 2075,775 v2(2075,820) ; v2(2180,845) 2210,875 2365,875 v2(2425,815) 84ISP.6 ; 328ISP.6 2555,1170 2600,1125 v2(2600,1055)
  Bottom Layer w20: 5V.4 290,1380 ; C14.2 401.57,1165 ; C15.2 401.57,1165 ; v2(465,1355) 440,1380 389.02,1380 290,1380 ; v2(575,1325) 660,1325 v2(675,1340) ; v2(585,1750) 540,1705 v2(540,1675) 785,1675 v2(825,1635) 900,1710 970,1710 v2(985,1695) ; v2(870,320) 890,300 v2(890,260) 920,230 1035,230 v2(1070,265) ; v2(1060,1675) 1060,1450 1190,1320 ; v2(1120,1100) 1115,1105 v2(1115,1160) 1125,1170 1125,1255 1190,1320 ; v2(1230,1280) 1190,1320 ; v2(1315,1370) 1325,1360 1545,1360 1605,1300 v2(1605,1115) 1530,1040 v2(1530,995) ; v2(1360,440) 1420,380 v2(1420,265) ; v2(1445,1005) 1490,960 1713.18,960 1772,1018.82 1772,1028.72 1788.28,1045 v2(1865,1045) ; v2(1930,695) 1940,685 1985,685 v2(2070,770) ; v2(2075,820) 2155,820 v2(2180,845) ; v2(2425,815) 2600,990 v2(2600,1055) ; 290,1380 290,1270 320,1240 440,1240 460,1220 460,1195 430,1165 401.57,1165
10VDC: 3.3V.3 5V.3 C16.2 C17.2 C18.2 C19.2 R13.2 | length 2057.7
  Top Layer w20: R13.2 935.61,270 v2(970,270)
  Bottom Layer w20: 3.3V.3 3.3V.3@401.3,707.17 ; 5V.3 499.45,1289.45 ; C16.2 C17.2 500,1486.81 500,1290 499.45,1289.45 ; v2(970,270) 970,272.94 970.17,273.11 668.28,575 C19.2 C18.2 401.81,706.65 3.3V.3@401.3,707.17 ; 3.3V.3@401.3,707.17 482.17,707.17 500,725 500,1250 499.45,1250.55 499.45,1289.45
AREF: IOH.8
GND: 3.3V.1@389.02,888.27 3.3V.2@767.5,90.94 5V.1@389.02,1470.55 5V.2@850,90.94 10VDC.2 84ISP.4 328ISP.4 328p.4 328p.18 328p.29 ACCL.1 ACCL.9 ACCL.11 ACCL.18 ADC328.1 ADC328.2 ADC328.3 AT84.1 AT84.2 AT84.3 Attiny84.8 Attiny84.21 BLE_UART.4 C1.2 C2.1 C3.1 C4.1 C5.2 C6.1 C7.1 C8.1 C9.1 C10.2 C14.1 C15.1 C16.1 C17.1 C18.1 C19.1 C20.1 C21.1 IOH.7 J3.1 J3.2 J3.3 J4.1 J4.2 J4.3 J5.1 J5.2 J5.3 J6.1 J6.3 POWER.2 POWER.3 R12.1 U1.13 U1.14 U1.21 Y1.2 Y1.4 | length 964.3
  Top Layer w6: C9.1 620.62,1518 628.62,1510 Attiny84.8 ; 3.3V.2@767.5,90.94 850,90.94 10VDC.2 ; C3.1 1002.32,407.05 1005,409.72 1005,438.78 ACCL.9 ; C5.2 1312,1232.8 1319.8,1225 328p.18 ; 328p.4 1570.2,1225 Y1.2 1575,1189.8 1595,1169.8 C8.1 ; Y1.4 1641.3,1286.1 1681.57,1326.38 C7.1 ; v2(1810,1290) 1832.68,1290 C6.1
  Bottom Layer w6: C19.1 C18.1 ; C20.1 C21.1 ; U1.14@1801.97,1369.21 1800,1367.24 1800,1330 1810,1320 ; v2(1810,1290) 1810,1320 ; U1.13@1872.83,1320 1810,1320
  other v1: 50,70 100,70 450,70 650,70 700,70 1000,70 1050,70 1150,70 1250,70 1350,70 1450,70 1900,70 2150,70 2250,70 2350,70 2450,70 2550,70 75,120 675,120 725,120 975,120 1025,120 1875,120 2575,120 2625,120 50,170 100,170 450,170 650,170 700,170 1000,170 1050,170 1100,170 1150,170 1200,170 1250,170 1350,170 1550,170 1600,170 1650,170 1700,170 1750,170 1800,170 1850,170 1900,170 2100,170 2150,170 2250,170 2350,170 2500,170 2550,170 2600,170 2650,170 75,220 475,220 525,220 575,220 625,220 675,220 725,220 1075,220 1575,220 1625,220 1675,220 1725,220 1775,220 1825,220 1875,220 2025,220 2075,220 2125,220 2425,220 2475,220 2525,220 50,270 100,270 450,270 500,270 550,270 600,270 650,270 700,270 1500,270 1750,270 1800,270 1850,270 1900,270 2400,270 2450,270 2500,270 75,320 1075,320 1175,320 1225,320 1375,320 1475,320 2325,320 2375,320 2425,320 2475,320 50,370 100,370 150,370 75,420 475,420 525,420 575,420 625,420 675,420 925,420 2625,420 50,470 100,470 1250,470 2600,470 2650,470 75,520 475,520 525,520 575,520 625,520 825,520 875,520 1175,520 1225,520 1275,520 1925,520 2625,520 50,570 100,570 800,570 850,570 1150,570 1200,570 1600,570 1650,570 1750,570 1800,570 1850,570 1900,570 1950,570 2600,570 2650,570 475,620 525,620 575,620 625,620 675,620 825,620 875,620 925,620 1175,620 1625,620 1775,620 1825,620 1875,620 2075,620 2125,620 2175,620 2625,620 500,670 550,670 600,670 650,670 700,670 800,670 850,670 1450,670 1500,670 1750,670 2100,670 225,720 275,720 1475,720 1575,720 2075,720 650,770 700,770 1450,770 1500,770 1600,770 2250,770 625,820 675,820 725,820 1475,820 2225,820 2325,820 2525,820 2575,820 50,870 650,870 700,870 750,870 2550,870 75,920 625,920 675,920 725,920 825,920 1975,920 2075,920 2225,920 2275,920 2325,920 2375,920 50,970 100,970 600,970 650,970 700,970 750,970 625,1020 675,1020 725,1020 875,1020 150,1070 200,1070 250,1070 650,1070 700,1070 750,1070 900,1070 1050,1070 2200,1070 575,1120 675,1120 725,1120 825,1120 1675,1120 1725,1120 575,1220 625,1220 675,1220 725,1320 950,1370 225,1420 275,1420 325,1420 1725,1420 1000,1470 1250,1470 1300,1470 1650,1470 1700,1470 1175,1520 1225,1520 1625,1520 1675,1520 1725,1520 600,1570 1150,1570 1200,1570 1600,1570 1650,1570 1700,1570 1275,1620 1575,1620 1625,1620 1675,1620 1725,1620 1250,1670 1300,1670 1600,1670 1650,1670 1700,1670 1075,1720 1125,1720 1175,1720 1225,1720 1575,1720 1625,1720 1675,1720 1725,1720 50,1770 100,1770 900,1770 1100,1770 1150,1770 1200,1770 1250,1770 1600,1770 1650,1770 1700,1770 75,1820 875,1820 1025,1820 1075,1820 1125,1820 1175,1820 1225,1820 1675,1820 1725,1820 50,1870 100,1870 1000,1870 1050,1870 1100,1870 1150,1870 1200,1870 1250,1870 75,1920 525,1920 675,1920 775,1920 875,1920 925,1920 975,1920 1025,1920 1075,1920 1125,1920 1175,1920 1475,1920 50,1970 100,1970 450,1970 500,1970 1700,1970 1750,1970 75,2020 475,2020 1725,2020
  other v4: 1925,120
IO0: 328p.26 BLE_UART.3 IC1.2 IOL1.1 R7.1 | length 3319.2
  Top Layer w6: 328p.26 1442.72,1127.28 1473.55,1096.45 1498.55,1096.45 1535,1060 1535,1018.28 1570,983.28 v2(1570,845) ; v2(1690,850) 1685,850 1753.46,781.54 IC1.2 R7.1 v2(1853.19,726.81) ; BLE_UART.3 2330,435 2390,495 2430,495 v2(2435,490) ; v2(2350,1595) 2350,1460 v2(2625,1185) ; v2(2475,1630) 2500,1655 IOL1.1
  Bottom Layer w6: v2(1570,845) 1575,850 v2(1690,850) ; v2(1853.19,726.81) 2050,530 2220,530 BLE_UART.3 ; v2(2350,1595) 2440,1595 v2(2475,1630) ; v2(2435,490) 2625,680 v2(2625,1185)
IO1: 328p.27 BLE_UART.2 IC4.2 IOL1.2 R8.1 | length 3005.9
  Top Layer w6: 328p.27 1460.43,1129.57 1475,1115 1505,1115 1560,1060 1560,1021.72 1605,976.72 1605,810 v2(1610,805) ; v2(1910,760) 1966.57,760 1971.57,755 ; IC4.2 1971.57,755 ; v2(2040,675) 2040,695 2008.19,726.81 R8.1 1971.57,755 ; IOL1.2 2130,1730 2130,800 2080,750 1976.57,750 1971.57,755
  Bottom Layer w6: v2(1610,805) 1855,805 1905,755 v2(1910,760) ; v2(2040,675) 2040,600 2070,570 2290,570 2430,430 BLE_UART.2
IO2: 328p.28 IOL1.3 | length 1570.5
  Top Layer w6: 328p.28 1499.8,1150.2 1590,1060 v2(1590,1035) ; v2(1835,1075) 1840,1070 2005,1235 2005,1515 2097,1607 2097,1797 IOL1.3
  Bottom Layer w6: v2(1590,1035) 1590,1030 1635,1075 v2(1835,1075)
IO3: 328p.1 IOL1.4 | length 1540.5
  Top Layer w6: 328p.1 1630.62,1041.03 1630.62,1015 1615,999.38 v2(1615,995) ; v2(1745,1030) 1745,1040 1790,1085 1790,1338.03 2060,1608.03 2060,1860 IOL1.4
  Bottom Layer w6: v2(1615,995) 1650,1030 v2(1745,1030)
IO4: 328p.2 ACCL.12 IOL1.5 | length 2513.3
  Top Layer w6: ACCL.12 1143.15,360 1320,360 1635,675 1635,1002.41 1642.62,1010.03 1642.62,1014.03 1643.6,1015 ; 328p.2 1520.43,1189.57 1575,1135 1575,1115 1643.6,1046.4 1643.6,1015 ; IOL1.5 2035,1935 2035,1615 1765,1345 1765,1110 1670,1015 1643.6,1015
IO5: 328p.7 IOL1.6 U1.34 | length 1799.7
  Top Layer w6: 328p.7 1540,1318.35 1540,1770 1640,1870 1845,1870 1975,2000 IOL1.6
  Bottom Layer w6: IOL1.6 2000,2005 2060,2065 2411,2065 2461,2015 2461,1966.27 2568.11,1859.16 U1.34
IO6: 328p.8 C10.1 IOL1.7 J6.4 R11.1 | length 2657.5
  Top Layer w6: J6.4 235,975 325,1065 v2(550,1065) 550.28,1064.72 R11.1 550.28,980 565,965.28 C10.1 ; v2(800,1305) 800,1300 1195,1300 v2(1320,1425) ; 328p.8 1520,1341.65 1520,1425 ; v2(1490,1425) 1520,1425 ; IOL1.7 1865,2000 1765,1900 1608.15,1900 1520,1811.85 1520,1425
  Bottom Layer w6: v2(550,1065) 560,1065 v2(800,1305) ; v2(1320,1425) v2(1490,1425)
IO7: 328p.9 IOL1.8 | length 925.5
  Top Layer w6: 328p.9 1460.43,1780 1610.43,1930 1755,1930 1800,1975 IOL1.8
IO8: 328p.10 IOH.1 | length 781.9
  Top Layer w6: 328p.10 1442.72,1802.72 IOH.1
IO9: 328p.11 IOH.2 | length 747.8
  Top Layer w6: 328p.11 1425,1825 1540,1940 IOH.2
IO10: 328p.12 IOH.3 | length 713.7
  Top Layer w6: 328p.12 1410,1302.52 1410,1855 1440,1885 IOH.3
IO11: 328ISP.5 328p.13 IOH.4 | length 2062.7
  Top Layer w6: IOH.4 1355,1985 1355,1725 1385.77,1694.23 1385.77,1303.6 328p.13 ; v2(2150,1155) 2155,1150 2185,1150 2215,1120 2445,1120 328ISP.5
  Bottom Layer w6: v2(1385,1630) 1415,1630 1890,1155 v2(2150,1155)
IO12: 328ISP.1 328p.14 IOH.5 | length 2050.9
  Top Layer w6: IOH.5 1315,1925 v2(1315,1770) 1315,1735 1360,1690 1360,1311.65 328p.14 ; v2(2155,1190) 2155,1185 2170,1170 328ISP.1
  Bottom Layer w6: v2(1315,1770) 1325,1770 1472.5,1622.5 1472.5,1597.5 1880,1190 v2(2155,1190)
IO13: 328ISP.2 328p.15 IOH.6 | length 2040.7
  Top Layer w6: IOH.6 1170,2000 1290,1880 1290,1725 1340,1675 v2(1340,1575) 1340,1288.35 328p.15 ; v2(2175,1125) 2185,1125 2240,1070 328ISP.2
  Bottom Layer w6: v2(1340,1575) 1440,1575 1890,1125 v2(2175,1125)
IOREF: POWER.7
Net1_1: 328p.6 C7.2 Y1.1 | length 201.2
  Top Layer w6: 328p.6 1525.63,1260.43 1551.3,1286.1 Y1.1 1575,1339.8 1595,1359.8 C7.2
Net1_3: 328p.5 C8.2 Y1.3 | length 260.5
  Top Layer w6: 328p.5 1527.91,1242.72 1545,1259.8 1545.22,1259.58 1615,1259.58 1619.49,1255.09 Y1.3 1655,1229.8 1681.57,1203.23 C8.2
Net3.3V_1: 3.3V.1@767.5,150 R17.1 | length 80.2
  Top Layer w12: 3.3V.1@767.5,150 R17.1 R17.1@767.5,230.2
Net5V_1: 5V.1@850,150 R18.1 | length 77.8
  Top Layer w12: 5V.1@850,150 R18.1
Net10VDC_1: 10VDC.1 R13.1 | length 77.8
  Top Layer w12: 10VDC.1 R13.1
Net84ISP_1: 84ISP.1 Attiny84.20 J3.5 | length 2786.1
  Top Layer w6: J3.5 245,1625 v2(509,1625) ; Attiny84.20 780.43,1545.43 795,1560 v2(795,1605) ; v2(990,1590) 1060,1590 v2(1255,1395) ; v2(2260,830) 84ISP.1
  Bottom Layer w6: v2(509,1625) 529,1645 755,1645 v2(795,1605) 975,1605 v2(990,1590) ; v2(1255,1395) 1415,1235 1415,985 1500,900 1860,900 1880,880 2220,880 2260,840 v2(2260,830)
Net84ISP_2: 84ISP.2 Attiny84.1 IC5.3 R14.1 | length 2462.4
  Top Layer w6: Attiny84.1 740.43,1610.43 780.8,1650.8 ; R14.1 839,1707.62 824.5,1693.12 IC5.3 780.8,1650.8 ; v2(930,1680) 910,1680 885,1655 785,1655 780.8,1650.8 ; v2(990,1645) 1190,1645 v2(1310,1525) ; v2(2150,1065) 2150,690 2195,645 84ISP.2
  Bottom Layer w6: v2(930,1680) 955,1680 v2(990,1645) ; v2(1310,1525) 1450,1525 1910,1065 v2(2150,1065)
Net84ISP_3: 84ISP.3 Attiny84.13 R10.1 | length 2501.1
  Top Layer w6: Attiny84.13 705,1396.26 R10.1 761.26,1340 v2(860,1340) ; v2(1800,325) 2020,545 84ISP.3
  Bottom Layer w6: v2(860,1340) 860,1215 795,1150 795,1043.28 1125,713.28 1125,710 1510,325 v2(1800,325)
Net84ISP_5: 84ISP.5 Attiny84.16 IC6.3 R19.1 | length 2308.7
  Top Layer w6: Attiny84.16 784.06,1474.57 792.02,1466.6 IC6.3 840,1463.48 840,1423.62 855,1408.62 R19.1 887.36,1367.64 v2(900,1355) ; v2(950,1075) 950,1150 v2(970,1170) ; v2(1080,915) 1095,900 v2(1390,900) ; v2(2190,800) 2190,780 2280,690 2420,690 2465,645 84ISP.5
  Bottom Layer w6: v2(900,1355) 970,1285 v2(970,1170) ; v2(950,1075) 950,1045 v2(1080,915) ; v2(1390,900) 1395,895 1460,895 1480,875 1835,875 1910,800 v2(2190,800)
Net328ISP_3: 328ISP.3 C11.2 POWER.6 R12.2 U1.32 | length 3505.3
  Top Layer w6: v2(1305,405) 1305,565 1410,670 1410,925.28 1390.28,945 ; C11.2 R12.2 1367.64,967.64 1390.28,945 ; v2(1510,922.5) 1510,935 1500,945 1390.28,945 ; v2(2260,1025) 2315,970 328ISP.3 2350,970 2400,1020 2620,1020 2650,1050 2650,1215 2435,1430 v2(2435,1920)
  Bottom Layer w6: POWER.6 1300,400 v2(1305,405) ; v2(1510,922.5) 1702.55,922.5 1805.05,1025 v2(2260,1025) ; v2(2435,1920) 2440,1925 2440,1895 2450,1885 U1.32
Net328p_19: 328p.19 AD.1 ADC328.4 | length 3011
  Top Layer w6: ADC328.4 200,1325 265,1390 590,1390 705,1275 v2(1085,1275) 1200,1275 1267.72,1207.28 328p.19
  Bottom Layer w6: v2(1085,1275) 1085,1090 1170,1005 1170,700 1510,360 1850,360 1940,270 1940,160 AD.1
Net328p_20: 328p.20 AD.2 ADC328.5 | length 2920.3
  Top Layer w6: ADC328.5 200,1225 250,1275 675,1275 705,1245 1185,1245 v2(1200,1230) 1200,1225 1225,1225 1260.43,1189.57 328p.20
  Bottom Layer w6: v2(1200,1230) 1195,1225 1195,1060 1210,1045 1210,700 1520,390 1860,390 1975,275 1975,225 AD.2
Net328p_21: 328p.21 AD.3 ADC328.6 | length 3013
  Top Layer w6: ADC328.6 245,1175 845,1175 v2(865,1155) ; v2(1135,950) v2(1285,950) ; v2(1280,1165) 1286.85,1171.85 328p.21
  Bottom Layer w6: v2(865,1155) 875,1145 935,1145 1115,965 1135,965 v2(1135,950) ; v2(1280,1165) 1280,1063.28 1285,1058.28 v2(1285,950) 1285,680 1530,435 1875,435 2007,303 2142,303 2200,245 AD.3
Net328p_22: 328p.22 AD.4 J6.6 | length 3047.3
  Top Layer w6: J6.6 250,830 445,830 v2(570,705) ; v2(1105,705) v2(1315,705) ; v2(1305,1125) 1315,1115 1365,1115 1371.85,1121.85 328p.22
  Bottom Layer w6: v2(570,705) v2(1105,705) ; v2(1305,1125) 1315,1115 v2(1315,705) 1315,690 1540,465 1875,465 2025,315 2225,315 2300,240 AD.4
Net328p_25: 328p.25 C11.1 R9.1 | length 151.8
  Top Layer w6: 328p.25 C11.1 1470.35,1084.45 1485,1069.8 R9.1@1485,1049.8
NetACCL_10: ACCL.10 C4.2 | length 137.6
  Top Layer w6: C4.2 1025,330 1035,340 1035,407.05 1024.84,417.2 ACCL.10
NetACCL_20: ACCL.20 C1.1 | length 81.7
  Top Layer w6: ACCL.20 1044.53,634.25 1053,642.72 C1.1
NetACCL_23: ACCL.23 IC2.3 R3.1 | length 290.4
  Top Layer w6: ACCL.23 985.47,645.2 1039.8,699.53 IC2.3 1080,764.72 1095,779.72 R3.1
NetACCL_24: ACCL.24 IC3.3 R4.1 | length 324.2
  Top Layer w6: IC3.3 860,764.72 ; R4.1 890,779.72 875,764.72 860,764.72 ; ACCL.24 965.79,633.94 860,739.72 860,764.72
NetAttiny84_2: Attiny84.2 J3.6 | length 641.1
  Top Layer w6: J3.6 195,1480 250,1535 480,1535 v2(510,1565) ; v2(715,1620) 722.72,1612.28 Attiny84.2
  Bottom Layer w6: v2(510,1565) 565,1620 v2(715,1620)
NetAttiny84_3: AT84.4 Attiny84.3 | length 761.9
  Top Layer w6: AT84.4 240,1980 395,1980 490,1885 490,1810 705,1595 Attiny84.3
NetAttiny84_4: AT84.5 Attiny84.4 | length 654.6
  Top Layer w6: AT84.5 200,1925 250,1875 400.06,1875 687.28,1587.77 Attiny84.4
NetAttiny84_5: AT84.6 Attiny84.5 | length 593.1
  Top Layer w6: AT84.6 195,1820 240,1775 480,1775 669.57,1585.43 Attiny84.5
NetAttiny84_15: Attiny84.15 J3.4 | length 932.1
  Top Layer w6: J3.4 270,1750 440,1750 470,1720 v2(470,1695) ; Attiny84.15 775,1416.38 v2(775,1390)
  Bottom Layer w6: v2(470,1695) 475,1690 475,1550 635,1390 v2(775,1390)
NetBLE_UART_1: BLE_UART.1
NetBLE_UART_6: BLE_UART.6
NetJ4_5: J4.5 J4.6 | length 100
  Top Layer w6: J4.6 J4.5
RX_Lowside: IC1.3 R5.1 U1.1 | length 1281.7
  Top Layer w6: R5.1 1759.17,931.54 IC1.3 1760,872.92 v2(1760,950)
  Bottom Layer w6: v2(1760,950) 1775,950 1783.24,958.24 2046.76,958.24 2051.76,963.24 2406.76,963.24 2578.5,1134.98 2578.5,1317 U1.1@2581.5,1320
SCL: 328p.24 AD.6 IC2.2 IC5.2 IOH.10 R1.1 R15.1 | length 4107.5
  Top Layer w6: R15.1 648.97,1783.67 IC5.2 740,1787.07 IOH.10 ; IC2.2 1002.4,917.4 1150,1065 v2(1250,1065) 1250,1099.8 ; v2(1030,1175) 1080,1125 1210,1125 1215,1120 R1.1 ; R1.1@1217.64,1099.8 1250,1099.8 ; 328p.24 1407.28,1112.09 1385,1089.8 1288.03,1089.8 1278.03,1099.8 1250,1099.8 ; v2(2015,260) v2(2340,260)
  Bottom Layer w6: IOH.10 740,1895 775,1860 925,1860 1030,1755 v2(1030,1175) ; v2(1250,1065) 1235,1050 1235,700 1525,410 1865,410 v2(2015,260) ; v2(2340,260) AD.6
SDA: 328p.23 AD.5 IC3.2 IC6.2 IOH.9 R2.1 R20.1 | length 3983.9
  Top Layer w6: IC3.2 790,1018.28 981.72,1210 1200,1210 v2(1215,1195) R2.1 1245,1149.8 1293,1101.8 1380.03,1101.8 1389.57,1111.34 328p.23 ; IOH.9 840,1895 950,1785 950,1671.72 932.64,1654.35 R20.1 932.64,1505.03 1095.03,1505.03 v2(1100,1510)
  Bottom Layer w6: v2(1100,1510) 1100,1475 1255,1320 1255,1195 ; v2(1215,1195) 1255,1195 ; AD.5 2400,165 2230,335 2030,335 1865,500 1540,500 1365,675 1365,1110 1280,1195 1255,1195
TX_Lowside: IC4.3 R6.1 U1.2 | length 939.1
  Top Layer w6: R6.1 1923.46,931.54 1930,925 ; IC4.3 1934.17,920.83 1930,925 ; v2(2010,1005) 1930,925
  Bottom Layer w6: v2(2010,1005) 2365,1005 2519.44,1159.44 2519.44,1317 U1.2@2522.44,1320
VCC: BLE_UART.5
VIN: POWER.1
pads on no net: ACCL.2 ACCL.3 ACCL.4 ACCL.5 ACCL.6 ACCL.7 ACCL.14 ACCL.15 ACCL.16 ACCL.17 ACCL.19 ACCL.21 ACCL.22 ACCL.25 Attiny84.6 Attiny84.7 Attiny84.10 Attiny84.11 Attiny84.12 Attiny84.14 Attiny84.17 Attiny84.18 Attiny84.19 J6.2 J6.5 POWER.8 U1.3 U1.4 U1.5 U1.6 U1.7 U1.8 U1.9 U1.10 U1.11 U1.15 U1.16 U1.17 U1.18 U1.19 U1.20 U1.22 U1.23 U1.24 U1.25 U1.26 U1.27 U1.28 U1.29 U1.30 U1.31 U1.33

## Polygon pours and split planes (outlines as drawn)
GND on Top Layer "Top Layer-No Net" (solid, pour order 0): 0,0 0,2100 2500,2100 2600,2000 2600,1600 2700,1500 2700,145 2555,0
GND on Bottom Layer "bottom gnd" (solid, pour order 6): 2600,0 2600,50 2700,150 2700,1500 2600,1600 2600,2000 2500,2100 0,2100 0,0

## Keep-outs
Keep-Out Layer:
  lines w5: 0,0 2600,0 2600,50 2700,146.92 2700,1500 2600,1600 2600,2000 2500,2100 0,2100 0,0

## Other copper
Top Layer:
  pour cut-out: 2600,1620 2710,1510 2700,1500 2700,1260 1880,1260 1770,1370 1790,1390 1790,1940 2600,1940
Bottom Layer:
  pour cut-out: 2600,1590 2710,1480 2700,1470 2700,1230 1880,1230 1770,1340 1790,1360 1790,1910 2600,1910

## Silkscreen, mask and mechanical layers (free items; w line width, h text height)
Top Overlay:
  text "ADC2" at 30,2020 h20
  text "IO7" at 1805,1912.93 h20 r225
  text "IO6 ~" at 1905,1912.93 h20 r225
  text "IO5 ~" at 2005,1912.93 h20 r225
  text "IO4" at 2105,1912.93 h20 r225
  text "IO3 ~" at 2205,1912.93 h20 r225
  text "IO2" at 2305,1912.93 h20 r225
  text "IO1" at 2405,1912.93 h20 r225
  text "IO0" at 2505,1912.93 h20 r225
  text "ADC1" at 30,1910 h20
  text "IO10 ~" at 1440,1910 h20 r225
  text "IO9 ~" at 1540,1910 h20 r225
  text "IO8" at 1640,1910 h20 r225
  text "SDA" at 840,1907.93 h20 r225
  text "SCL" at 740,1902.93 h20 r225
  text "AREF" at 940,1902.93 h20 r225
  text "GND" at 1040,1902.93 h20 r225
  text "IO13" at 1140,1902.93 h20 r225
  text "IO12" at 1240,1902.93 h20 r225
  text "IO11 ~" at 1340,1902.93 h20 r225
  text "ADC0" at 30,1810 h20
  text "ADC7" at 30,1670 h20
  text "EDL Control Board" at 2060,1670 h30
  text "ADC5" at 30,1560 h20
  text "ADC3" at 30,1460 h20
  text "ADC0" at 30,1320 h20
  text "ADC1" at 30,1220 h20
  text "ADC2" at 30,1110 h20
  text "D6" at 50,960 h20
  text "ADC3" at 20,750 h20
  text "3v3" at 40,620 h20
  text "3v3" at 40,520 h20
  text "5v" at 40,410 h20
  text "5v" at 40,270 h20
  text "IOREF" at 1195,187.07 h20 r45
  text "RESET" at 1300,187.07 h20 r45
  text "3v3" at 1400,187.07 h20 r45
  text "5v" at 1500,187.07 h20 r45
  text "GND" at 1600,187.07 h20 r45
  text "GND" at 1700,187.07 h20 r45
  text "Vin" at 1800,187.07 h20 r45
  text "AD0" at 2000,187.07 h20 r45
  text "AD1" at 2100,187.07 h20 r45
  text "AD2" at 2200,187.07 h20 r45
  text "AD3" at 2300,187.07 h20 r45
  text "AD4" at 2400,187.07 h20 r45
  text "AD5" at 2500,187.07 h20 r45
  text "10v" at 40,180 h20
  text "10v" at 40,60 h20
  text "RESET" at 1295,-2515 h20 r45
  text "3v3" at 1395,-2515 h20 r45
  text "5v" at 1495,-2515 h20 r45
  text "GND" at 1595,-2515 h20 r45
  text "GND" at 1695,-2515 h20 r45
  text "Vin" at 1795,-2515 h20 r45
Bottom Overlay:
  text "KevinKuwata.com" at 2390,1260 h20
  text "EDL Control Board / 328p & ATtiny84A / kevinkuwata.com / 4/4/18" at 660,40 h30
Mechanical 1:
  circle w5: c2600,1400 r62.99
  circle w5: c550,100 r62.99
  circle w5: c2600,300 r62.99
  circle w5: c600,2000 r62.99
  lines w5: 0,2100 0,0 2600,0